# EAGLE board pavement_painter_v5 (EAGLE 9.1.3)
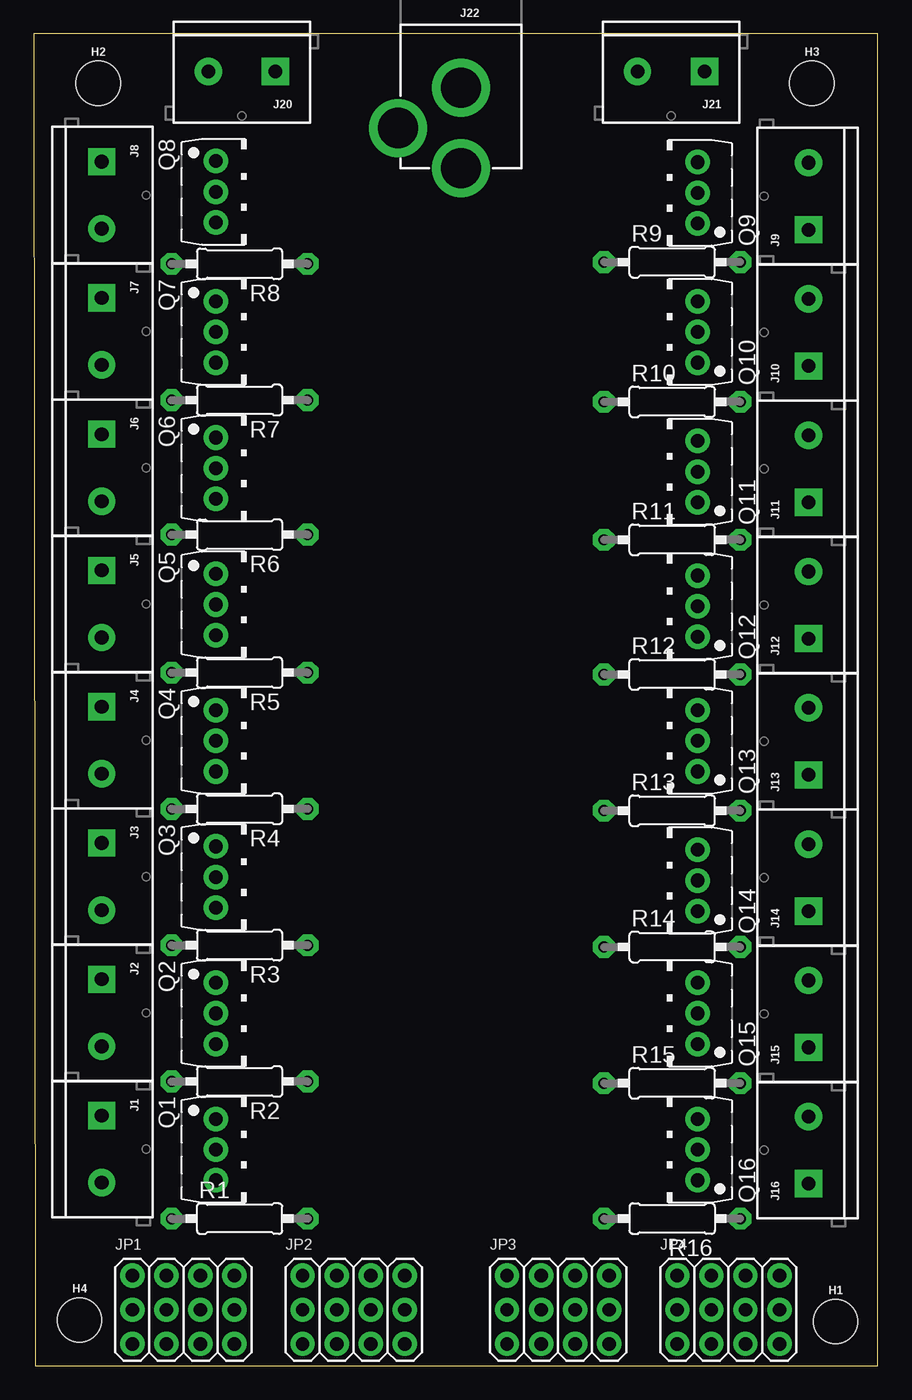
[diagram p0: board, top side]
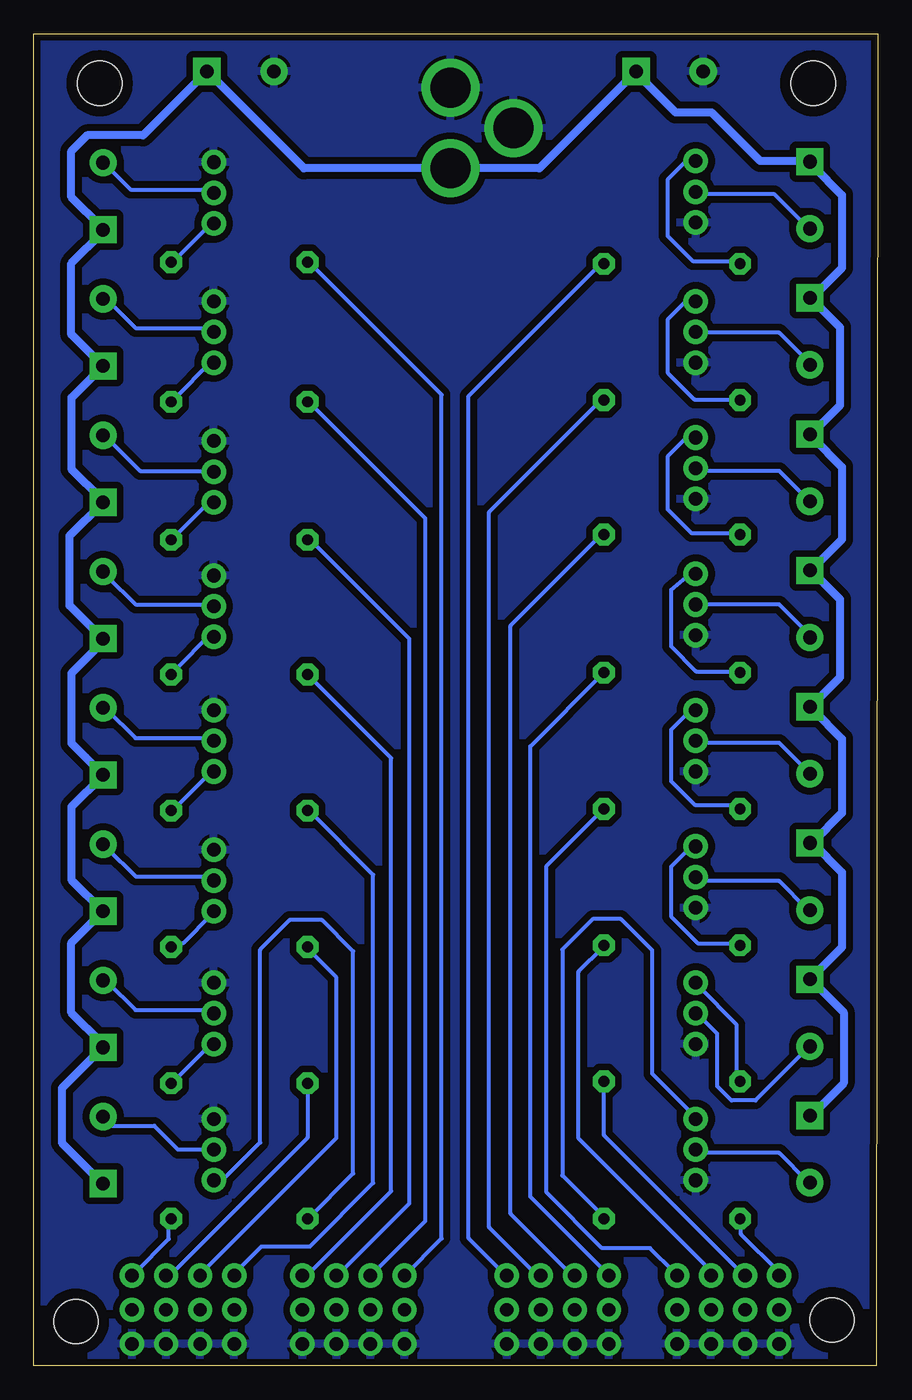
[diagram p1: board, bottom side, seen from below]

Size 62.97 x 99.34 mm. Coordinates in mm from the lower left corner, seen from the top.
Outline: 0.13,0 62.97,0 62.97,99.34 0.64,99.34 0.38,99.34 0,99.34 0,99.19 0.13,0
Copper layers (1*16): Top 0.035mm / dielectric 1.5mm / Bottom 0.035mm
Design rules "pavement *": minimum track width 12mil, minimum drill 0.35mm, track to track 16mil, track to pad 16mil, pad to pad 16mil, via to via 16mil, smd to smd 6mil, copper to edge 20mil, drill to drill 10mil, minimum pad ring 16mil, minimum via ring 8mil, stop-mask expansion 4mil, vias tented up to drill 0mil, thermal gap 10mil

## Footprints (pad centres in the part's own frame; a part is rotated, then mirrored left to right if it is on the bottom)
STAND-OFF = hole 3.302: 0,0
SCREWTERMINAL-5MM-2-400MIL = drill 1.016 pad 2.032 square: 1 0,0.381 | drill 1.016 pad 2.032: 2 5,0.381
POWER_JACK_PTH = drill 2.997 pad 4.318: GND 0,7.7; GNDBREAK 4.7,10.7; PWR 0,13.7
3X04 = drill 1 pad 1.778: 1 -3.81,-2.54; 2 -3.81,0; 3 -3.81,2.54; 4 -1.27,-2.54; 5 -1.27,0; 6 -1.27,2.54; 7 1.27,-2.54; 8 1.27,0; 9 1.27,2.54; 10 3.81,-2.54; 11 3.81,0; 12 3.81,2.54
BD679V = drill 1.016 pad 1.778: B -2.286,-0.254; C 0,-0.254; E 2.286,-0.254
0207/10 = drill 0.813 octagon: 1 -5.08,0; 2 5.08,0

## Placement (x,y rotation side)
FRAME1  FRAME-LETTER  [CREATIVE_COMMONS]  8.51,-7.75 0 top  (outside the outline)
H1  STAND-OFF  [STAND-OFF]  59.82,3.3 0 top
H2  STAND-OFF  [STAND-OFF]  4.83,95.63 0 top
H3  STAND-OFF  [STAND-OFF]  58.04,95.63 0 top
H4  STAND-OFF  [STAND-OFF]  3.43,3.43 0 top
J1  [SCREWTERMINAL-5MM-2-400MIL]  4.7,18.67 270 top
J2  [SCREWTERMINAL-5MM-2-400MIL]  4.7,28.83 270 top
J3  [SCREWTERMINAL-5MM-2-400MIL]  4.7,38.99 270 top
J4  [SCREWTERMINAL-5MM-2-400MIL]  4.7,49.15 270 top
J5  [SCREWTERMINAL-5MM-2-400MIL]  4.7,59.31 270 top
J6  [SCREWTERMINAL-5MM-2-400MIL]  4.7,69.47 270 top
J7  [SCREWTERMINAL-5MM-2-400MIL]  4.7,79.63 270 top
J8  [SCREWTERMINAL-5MM-2-400MIL]  4.7,89.79 270 top
J9  [SCREWTERMINAL-5MM-2-400MIL]  58.17,84.71 90 top
J10  [SCREWTERMINAL-5MM-2-400MIL]  58.17,74.55 90 top
J11  [SCREWTERMINAL-5MM-2-400MIL]  58.17,64.39 90 top
J12  [SCREWTERMINAL-5MM-2-400MIL]  58.17,54.23 90 top
J13  [SCREWTERMINAL-5MM-2-400MIL]  58.17,44.07 90 top
J14  [SCREWTERMINAL-5MM-2-400MIL]  58.17,33.91 90 top
J15  [SCREWTERMINAL-5MM-2-400MIL]  58.17,23.75 90 top
J16  [SCREWTERMINAL-5MM-2-400MIL]  58.17,13.59 90 top
J20  [SCREWTERMINAL-5MM-2-400MIL]  18.03,96.9 180 top
J21  [SCREWTERMINAL-5MM-2-400MIL]  50.04,96.9 180 top
J22  POWER_JACK  [POWER_JACK_PTH]  31.88,103 180 top
JP1  [3X04]  11.18,4.19 0 top
JP2  [3X04]  23.88,4.19 0 top
JP3  [3X04]  39.12,4.19 0 top
JP4  [3X04]  51.82,4.19 0 top
Q1  TIP120  [BD679V]  13.84,16.13 270 top
Q2  TIP120  [BD679V]  13.84,26.29 270 top
Q3  TIP120  [BD679V]  13.84,36.45 270 top
Q4  TIP120  [BD679V]  13.84,46.61 270 top
Q5  TIP120  [BD679V]  13.84,56.77 270 top
Q6  TIP120  [BD679V]  13.84,66.93 270 top
Q7  TIP120  [BD679V]  13.84,77.09 270 top
Q8  TIP120  [BD679V]  13.84,87.54 270 top
Q9  TIP120  [BD679V]  49.28,87.46 90 top
Q10  TIP120  [BD679V]  49.28,77.09 90 top
Q11  TIP120  [BD679V]  49.28,66.67 90 top
Q12  TIP120  [BD679V]  49.28,56.64 90 top
Q13  TIP120  [BD679V]  49.28,46.61 90 top
Q14  TIP120  [BD679V]  49.28,36.2 90 top
Q15  TIP120  [BD679V]  49.28,26.29 90 top
Q16  TIP120  [BD679V]  49.28,16.13 90 top
R1  1k  [0207/10]  15.37,10.99 0 top
R2  1k  [0207/10]  15.37,21.21 180 top
R3  1k  [0207/10]  15.37,31.37 180 top
R4  1k  [0207/10]  15.37,41.53 180 top
R5  1k  [0207/10]  15.37,51.69 180 top
R6  1k  [0207/10]  15.37,61.98 180 top
R7  1k  [0207/10]  15.37,72.01 180 top
R8  1k  [0207/10]  15.37,82.17 180 top
R9  1k  [0207/10]  47.62,82.3 0 top
R10  1k  [0207/10]  47.62,71.88 0 top
R11  1k  [0207/10]  47.62,61.59 0 top
R12  1k  [0207/10]  47.62,51.56 0 top
R13  1k  [0207/10]  47.62,41.4 0 top
R14  1k  [0207/10]  47.62,31.24 0 top
R15  1k  [0207/10]  47.62,21.08 0 top
R16  1k  [0207/10]  47.62,10.99 180 top

## Library data of the parts
FRAME1 = SparkFun-Aesthetics
H1-H4 = SparkFun-Hardware
J1-J16 J20 J21 = SparkFun-Connectors
J22 = SparkFun-Connectors; PROD_ID: CONN-08197
JP1-JP4 = microbuilder
Q1-Q16 = TIP120
R1-R16 = rcl; SPICEPREFIX: R

## Nets
+12V: J1.1 J2.1 J3.1 J4.1 J5.1 J6.1 J7.1 J8.1 J9.1 J10.1 J11.1 J12.1 J13.1 J14.1 J15.1 J16.1 J20.1 J21.1 J22.PWR
GND: J20.2 J21.2 J22.GND J22.GNDBREAK JP1.1 JP1.4 JP1.7 JP1.10 JP2.1 JP2.4 JP2.7 JP2.10 JP3.1 JP3.4 JP3.7 JP3.10 JP4.1 JP4.4 JP4.7 JP4.10 Q1.E Q2.E Q3.E Q4.E Q5.E Q6.E Q7.E Q8.E Q9.E Q10.E Q11.E Q12.E Q13.E Q14.E Q15.E Q16.E
N$1: J2.2 Q2.C
N$2: Q2.B R2.2
N$3: J1.2 Q1.C
N$4: Q1.B R1.2
N$5: J3.2 Q3.C
N$6: Q3.B R3.2
N$7: J4.2 Q4.C
N$8: Q4.B R4.2
N$9: J5.2 Q5.C
N$10: Q5.B R5.2
N$11: J6.2 Q6.C
N$12: Q6.B R6.2
N$13: J7.2 Q7.C
N$14: Q7.B R7.2
N$15: J8.2 Q8.C
N$16: Q8.B R8.2
N$17: J9.2 Q9.C
N$18: Q9.B R9.2
N$19: J10.2 Q10.C
N$20: Q10.B R10.2
N$21: J11.2 Q11.C
N$22: Q11.B R11.2
N$23: J12.2 Q12.C
N$24: Q12.B R12.2
N$25: J13.2 Q13.C
N$26: Q13.B R13.2
N$27: J14.2 Q14.C
N$28: Q14.B R14.2
N$29: J15.2 Q15.C
N$30: Q15.B R15.2
N$31: J16.2 Q16.C
N$32: Q16.B R16.2
PCA_SOL1: JP1.3 R1.1
PCA_SOL2: JP1.6 R2.1
PCA_SOL3: JP1.9 R3.1
PCA_SOL4: JP1.12 R4.1
PCA_SOL5: JP2.3 R5.1
PCA_SOL6: JP2.6 R6.1
PCA_SOL7: JP2.9 R7.1
PCA_SOL8: JP2.12 R8.1
PCA_SOL9: JP3.3 R9.1
PCA_SOL10: JP3.6 R10.1
PCA_SOL11: JP3.9 R11.1
PCA_SOL12: JP3.12 R12.1
PCA_SOL13: JP4.3 R13.1
PCA_SOL14: JP4.6 R14.1
PCA_SOL15: JP4.9 R15.1
PCA_SOL16: JP4.12 R16.1

## Tracks (layer width: path | path; a pad name or v marks a point on that pad's centre or on a via)
+12V
  Bottom 0.61: J1.1 4.88,18.72 4.88,18.77 2.56,21.08 2.56,26.36 4.88,28.68 J2.1 2.69,31.22 2.69,36.8 4.88,38.99 | 4.88,38.99 4.88,39.04 2.69,41.22 2.69,46.76 4.88,48.95 J4.1 4.88,49.3 2.82,51.36 2.82,57.15 4.88,59.21 4.88,59.26 J5.1 5,59.31 2.69,61.62 2.69,67.03 4.88,69.22 J6.1 4.88,69.57 2.82,71.63 2.82,77.42 4.88,79.48 4.88,79.53 J7.1 4.93,79.63 2.69,81.86 2.69,87.3 4.88,89.48 J8.1 5.23,89.84 8.79,89.84 12.39,93.45 15.09,93.45 18.03,96.39 J20.1 25.26,89.3 J22.PWR 42.81,89.3 J21.1 54.81,91.75 58.98,91.75 60.15,90.58 60.15,87.15 57.86,84.86 J9.1 57.86,84.51 60.15,82.22 60.15,76.89 60.12,76.89 J10.1 60.12,72.21 60.15,72.21 60.15,66.88 57.86,64.59 J11.1 60.27,61.9 60.27,56.69 57.86,54.28 J12.1 57.86,53.92 60.15,51.64 60.15,46.43 J13.1 57.86,43.97 60.15,41.68 60.15,36.25 57.81,33.91 J14.1 60.15,31.55 60.15,26.34 57.86,24.05 J15.1 57.86,23.7 60.86,20.7 60.86,16.64 57.81,13.59 J16.1 | 4.88,38.99 J3.1
GND
  pour Bottom (isolate 0.508): 0.25,-0.13 0.25,98.93 0.25,99.69 63.25,99.69 63.25,-0.13
N$1
  Bottom 0.305: Q2.C 13.41,26.19 11.99,24.77 11.99,20.85 10.92,19.79 9.14,19.79 5.23,23.7 J2.2
N$2
  Bottom 0.305: R2.2 10.57,21.21 10.57,25.48 13.41,28.32 Q2.B
N$3
  Bottom 0.305: Q1.C 13.41,15.88 7.37,15.88 5.23,13.74 J1.2
N$4
  Bottom 0.305: R1.2 20.49,11.15 23.55,14.2 23.55,31.04 21.26,33.33 19.18,33.33 16.84,30.99 16.84,21.79 13.77,18.72 Q1.B
N$5
  Bottom 0.305: Q3.C 13.41,36.14 7.37,36.14 5.23,34.01 J3.2
N$6
  Bottom 0.305: R3.2 10.57,31.52 13.44,31.52 15.44,33.53 15.44,37.21 14.36,38.3 Q3.B
N$7
  Bottom 0.305: Q4.C 13.41,46.46 7.37,46.46 5.23,44.32 J4.2
N$8
  Bottom 0.305: R4.2 10.57,41.83 13.66,41.83 15.44,43.61 15.44,47.42 13.97,48.9 Q4.B
N$9
  Bottom 0.305: Q5.C 13.41,56.77 7.37,56.77 5.23,54.63 J5.2
N$10
  Bottom 0.305: R5.2 10.57,51.79 13.56,51.79 15.44,53.67 15.44,57.85 14.03,59.05 Q5.B
N$11
  Bottom 0.305: Q6.C 13.41,66.73 7.37,66.73 5.23,64.59 J6.2
N$12
  Bottom 0.305: R6.2 10.57,62.1 13.92,62.1 15.7,63.88 15.7,67.79 14.28,69.22 Q6.B
N$13
  Bottom 0.305: Q7.C 13.41,77.04 7.37,77.04 5.23,74.91 J7.2
N$14
  Bottom 0.305: R7.2 10.57,72.06 13.69,72.06 15.7,74.07 15.7,78 14.33,79.38 Q7.B
N$15
  Bottom 0.305: Q8.C 13.41,87.35 7.72,87.35 5.23,84.86 J8.2
N$16
  Bottom 0.305: R8.2 10.57,82.37 13.82,82.37 15.7,84.25 15.7,88.44 14.31,89.83 Q8.B
N$17
  Bottom 0.305: Q9.C 49.68,87.71 55.73,87.71 57.51,89.48 J9.2
N$18
  Bottom 0.305: R9.2 52.53,82.37 49.68,85.22 Q9.B
N$19
  Bottom 0.305: Q10.C 49.68,77.39 55.37,77.39 57.51,79.53 J10.2
N$20
  Bottom 0.305: R10.2 52.53,72.06 49.68,74.91 Q10.B
N$21
  Bottom 0.305: Q11.C 49.68,66.73 55.02,66.73 57.51,69.22 J11.2
N$22
  Bottom 0.305: R11.2 52.53,61.75 49.68,64.59 Q11.B
N$23
  Bottom 0.305: Q12.C 49.68,56.77 55.37,56.77 57.51,58.9 J12.2
N$24
  Bottom 0.305: R12.2 52.53,51.79 49.68,54.63 Q12.B
N$25
  Bottom 0.305: Q13.C 49.68,46.81 55.37,46.81 57.51,48.95 J13.2
N$26
  Bottom 0.305: R13.2 52.53,41.48 49.68,44.32 Q13.B
N$27
  Bottom 0.305: Q14.C 49.68,36.5 55.37,36.5 57.51,38.63 J14.2
N$28
  Bottom 0.305: R14.2 52.53,31.52 51.82,31.52 49.68,33.66 Q14.B
N$29
  Bottom 0.305: Q15.C 49.68,26.54 55.37,26.54 57.51,28.68 J15.2
N$30
  Bottom 0.305: R15.2 52.53,21.21 49.68,24.05 Q15.B
N$31
  Bottom 0.305: Q16.C 52.2,16.13 53.98,17.91 57.1,17.91 J16.2
N$32
  Bottom 0.305: R16.2 42.51,10.99 39.14,14.36 39.14,30.92 41.47,33.25 43.88,33.25 46.08,31.05 46.08,16.66 48.9,13.84 Q16.B
PCA_SOL1
  Bottom 0.305: R1.1 10.21,10.9 10.21,9.83 7.37,6.99 JP1.3
PCA_SOL2
  Bottom 0.305: R2.1 20.42,21.21 20.42,17.2 10.21,6.99 JP1.6
PCA_SOL3
  Bottom 0.305: R3.1 20.49,31.25 22.33,29.41 22.33,16.97 12.34,6.99 JP1.9
PCA_SOL4
  Bottom 0.305: R4.1 20.52,41.48 24.71,37.29 24.71,12.93 20.57,8.79 16.99,8.79 15.19,6.99 JP1.12
PCA_SOL5
  Bottom 0.305: R5.1 25.93,46.2 25.93,12.62 20.07,6.76 JP2.3
PCA_SOL6
  Bottom 0.305: R6.1 20.62,61.98 27.41,55.19 27.41,11.35 22.78,6.73 JP2.6
PCA_SOL7
  Bottom 0.305: R7.1 20.65,72.01 29.01,63.65 29.01,10.34 25.4,6.73 JP2.9
PCA_SOL8
  Bottom 0.305: JP2.12 27.99,6.99 30.53,9.53 30.53,72.31 20.68,82.17 R8.1
PCA_SOL9
  Bottom 0.305: R9.1 42.42,82.3 32.54,72.42 32.54,9.5 JP3.3
PCA_SOL10
  Bottom 0.305: R10.1 42.22,71.7 42.22,71.65 33.76,63.2 33.76,10.82 JP3.6
PCA_SOL11
  Bottom 0.305: JP3.9 40.08,6.99 34.95,12.12 34.95,54.2 42.34,61.59 R11.1
PCA_SOL12
  Bottom 0.305: JP3.12 42.6,6.73 36.3,13.03 36.3,45.31 38.2,47.22 R12.1
PCA_SOL13
  Bottom 0.305: JP4.3 47.9,6.99 45.97,8.91 42.37,8.91 37.64,13.64 37.64,36.63 42.42,41.4 R13.1
PCA_SOL14
  Bottom 0.305: JP4.6 50.39,6.99 40.39,16.99 40.39,28.96 42.55,31.11 R14.1
PCA_SOL15
  Bottom 0.305: R15.1 42.55,17.02 52.83,6.73 JP4.9
PCA_SOL16
  Bottom 0.305: R16.1 52.88,10.9 52.88,9.47 55.37,6.99 JP4.12